# Altium PCB PCB.PcbDoc (part 1 of 2)
Units mil, origin at the board's own origin, x right, y up, seen from the top; angles counter-clockwise.
Board outline 14787 x 8400 mil, 2 copper layers (Top Layer, Bottom Layer); 237 components, 242 nets, 855 pads, 3 vias.
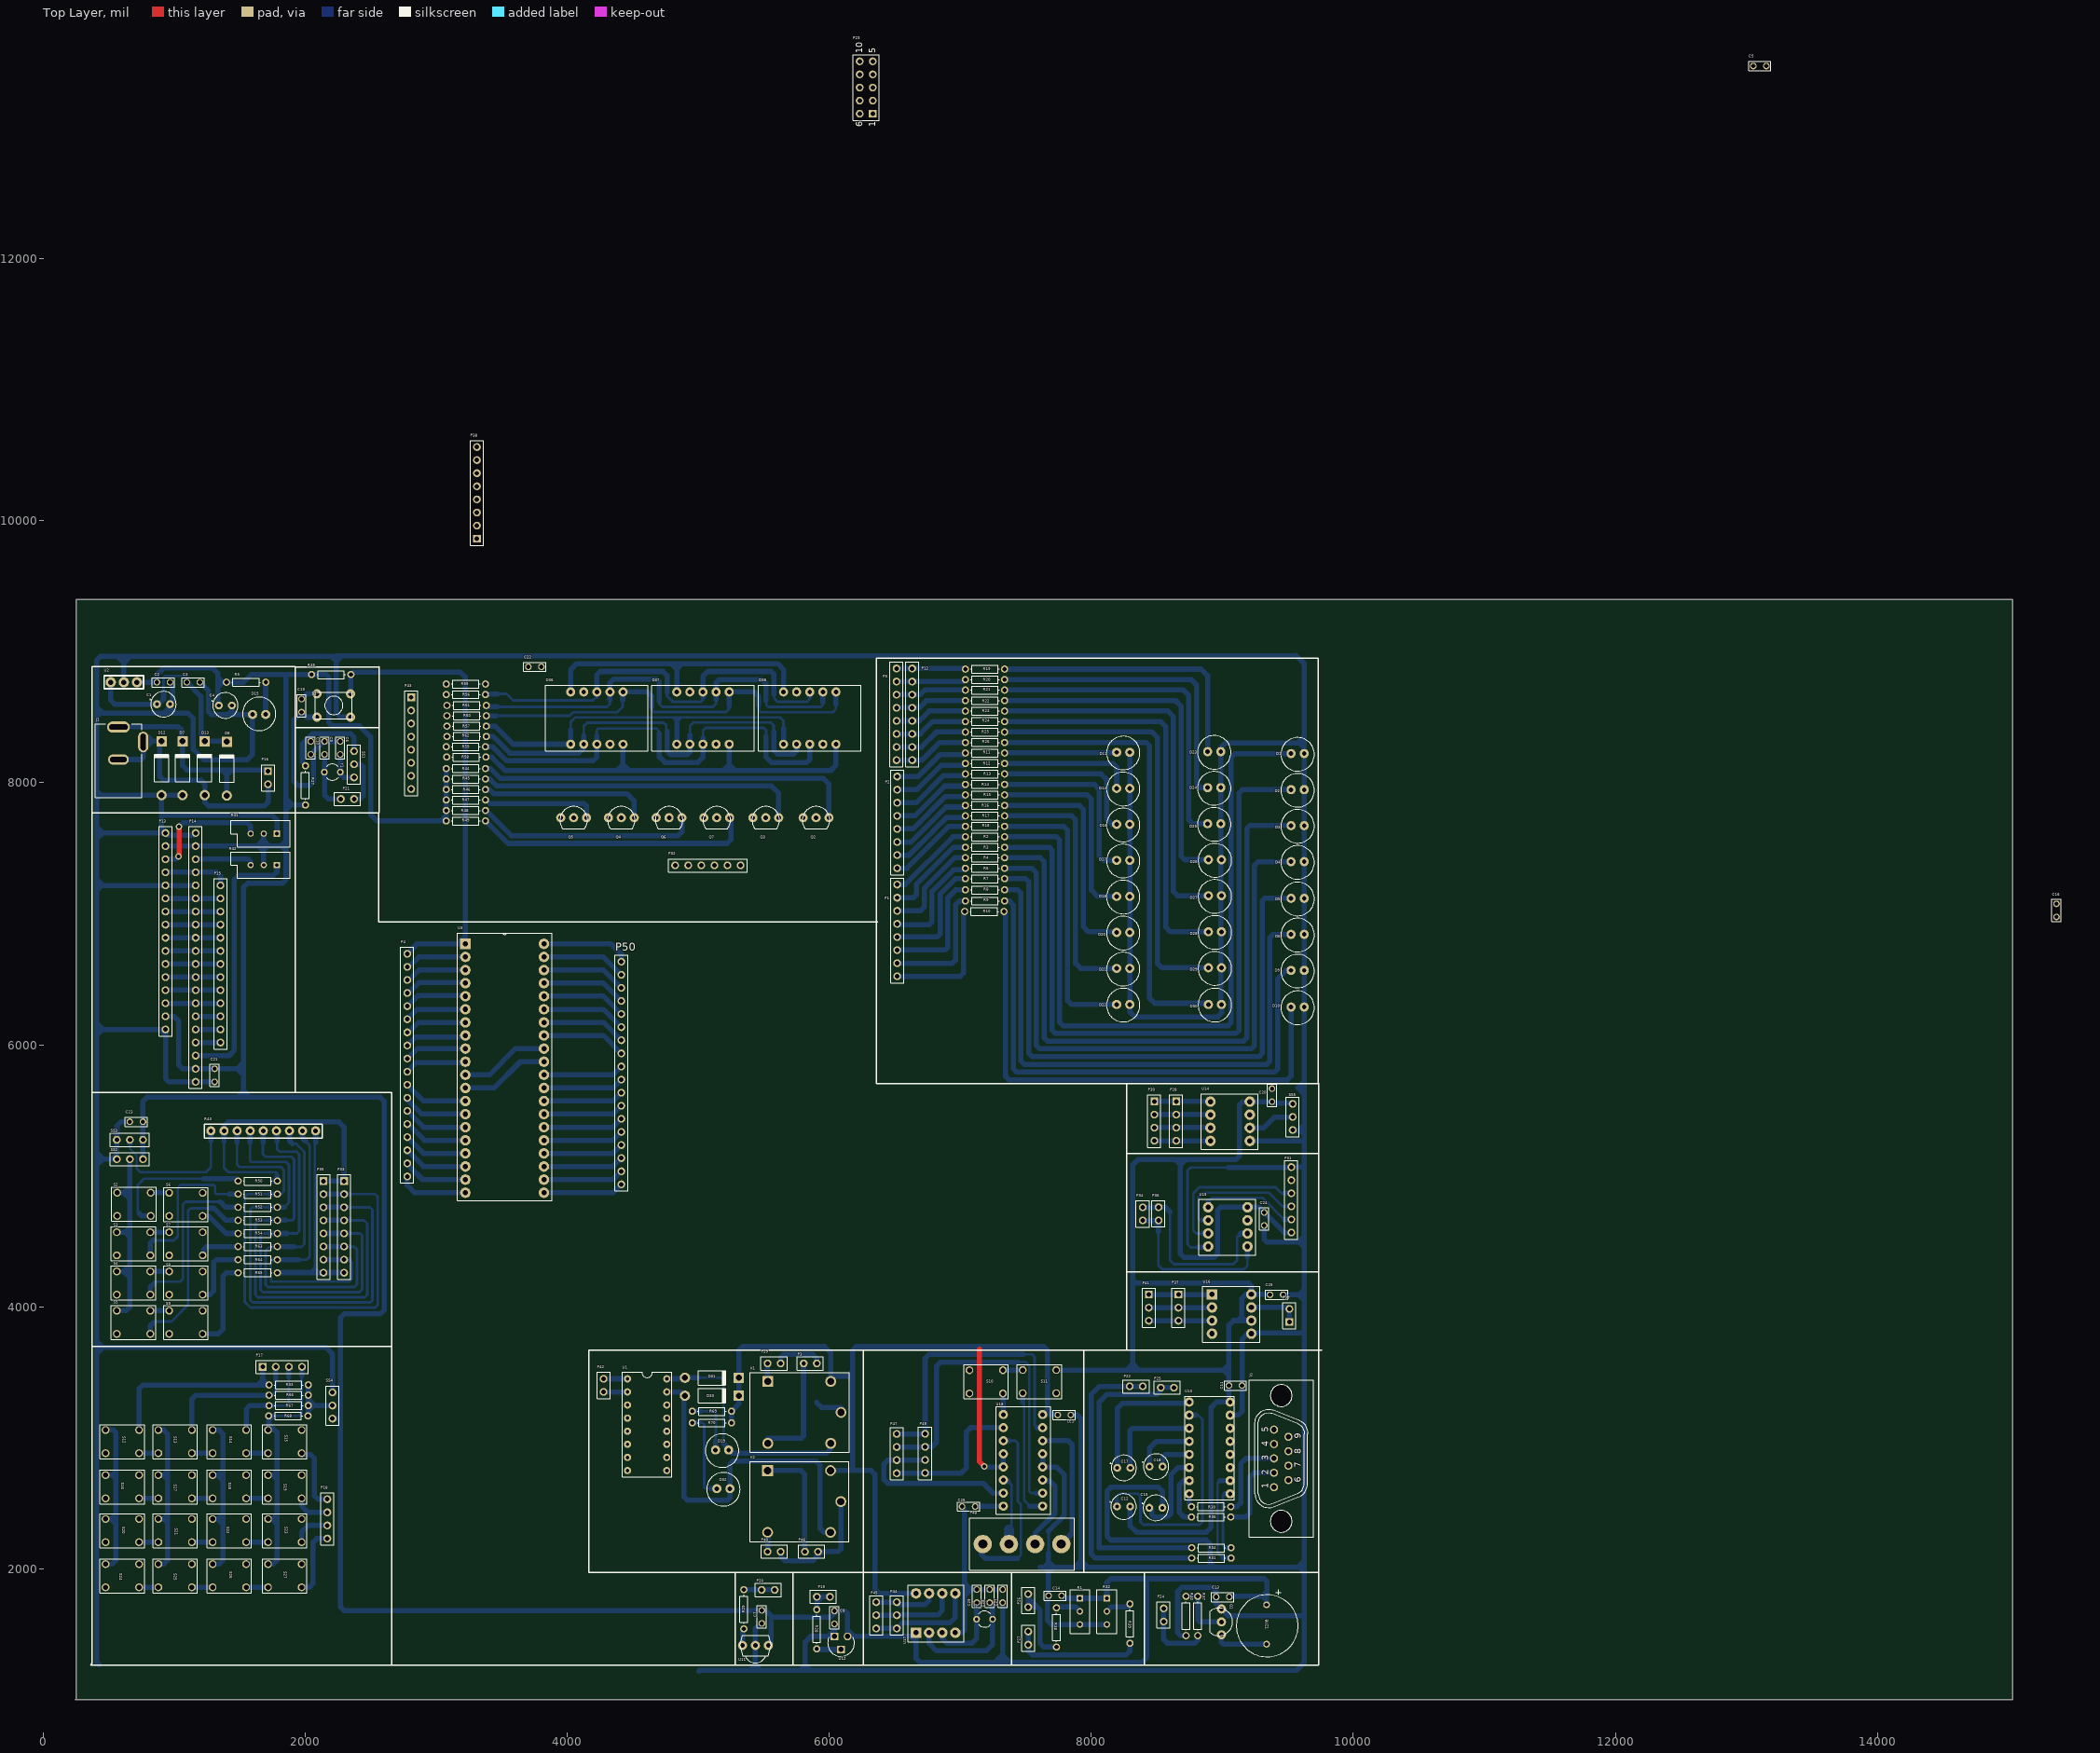
[diagram p0: Top Layer view]
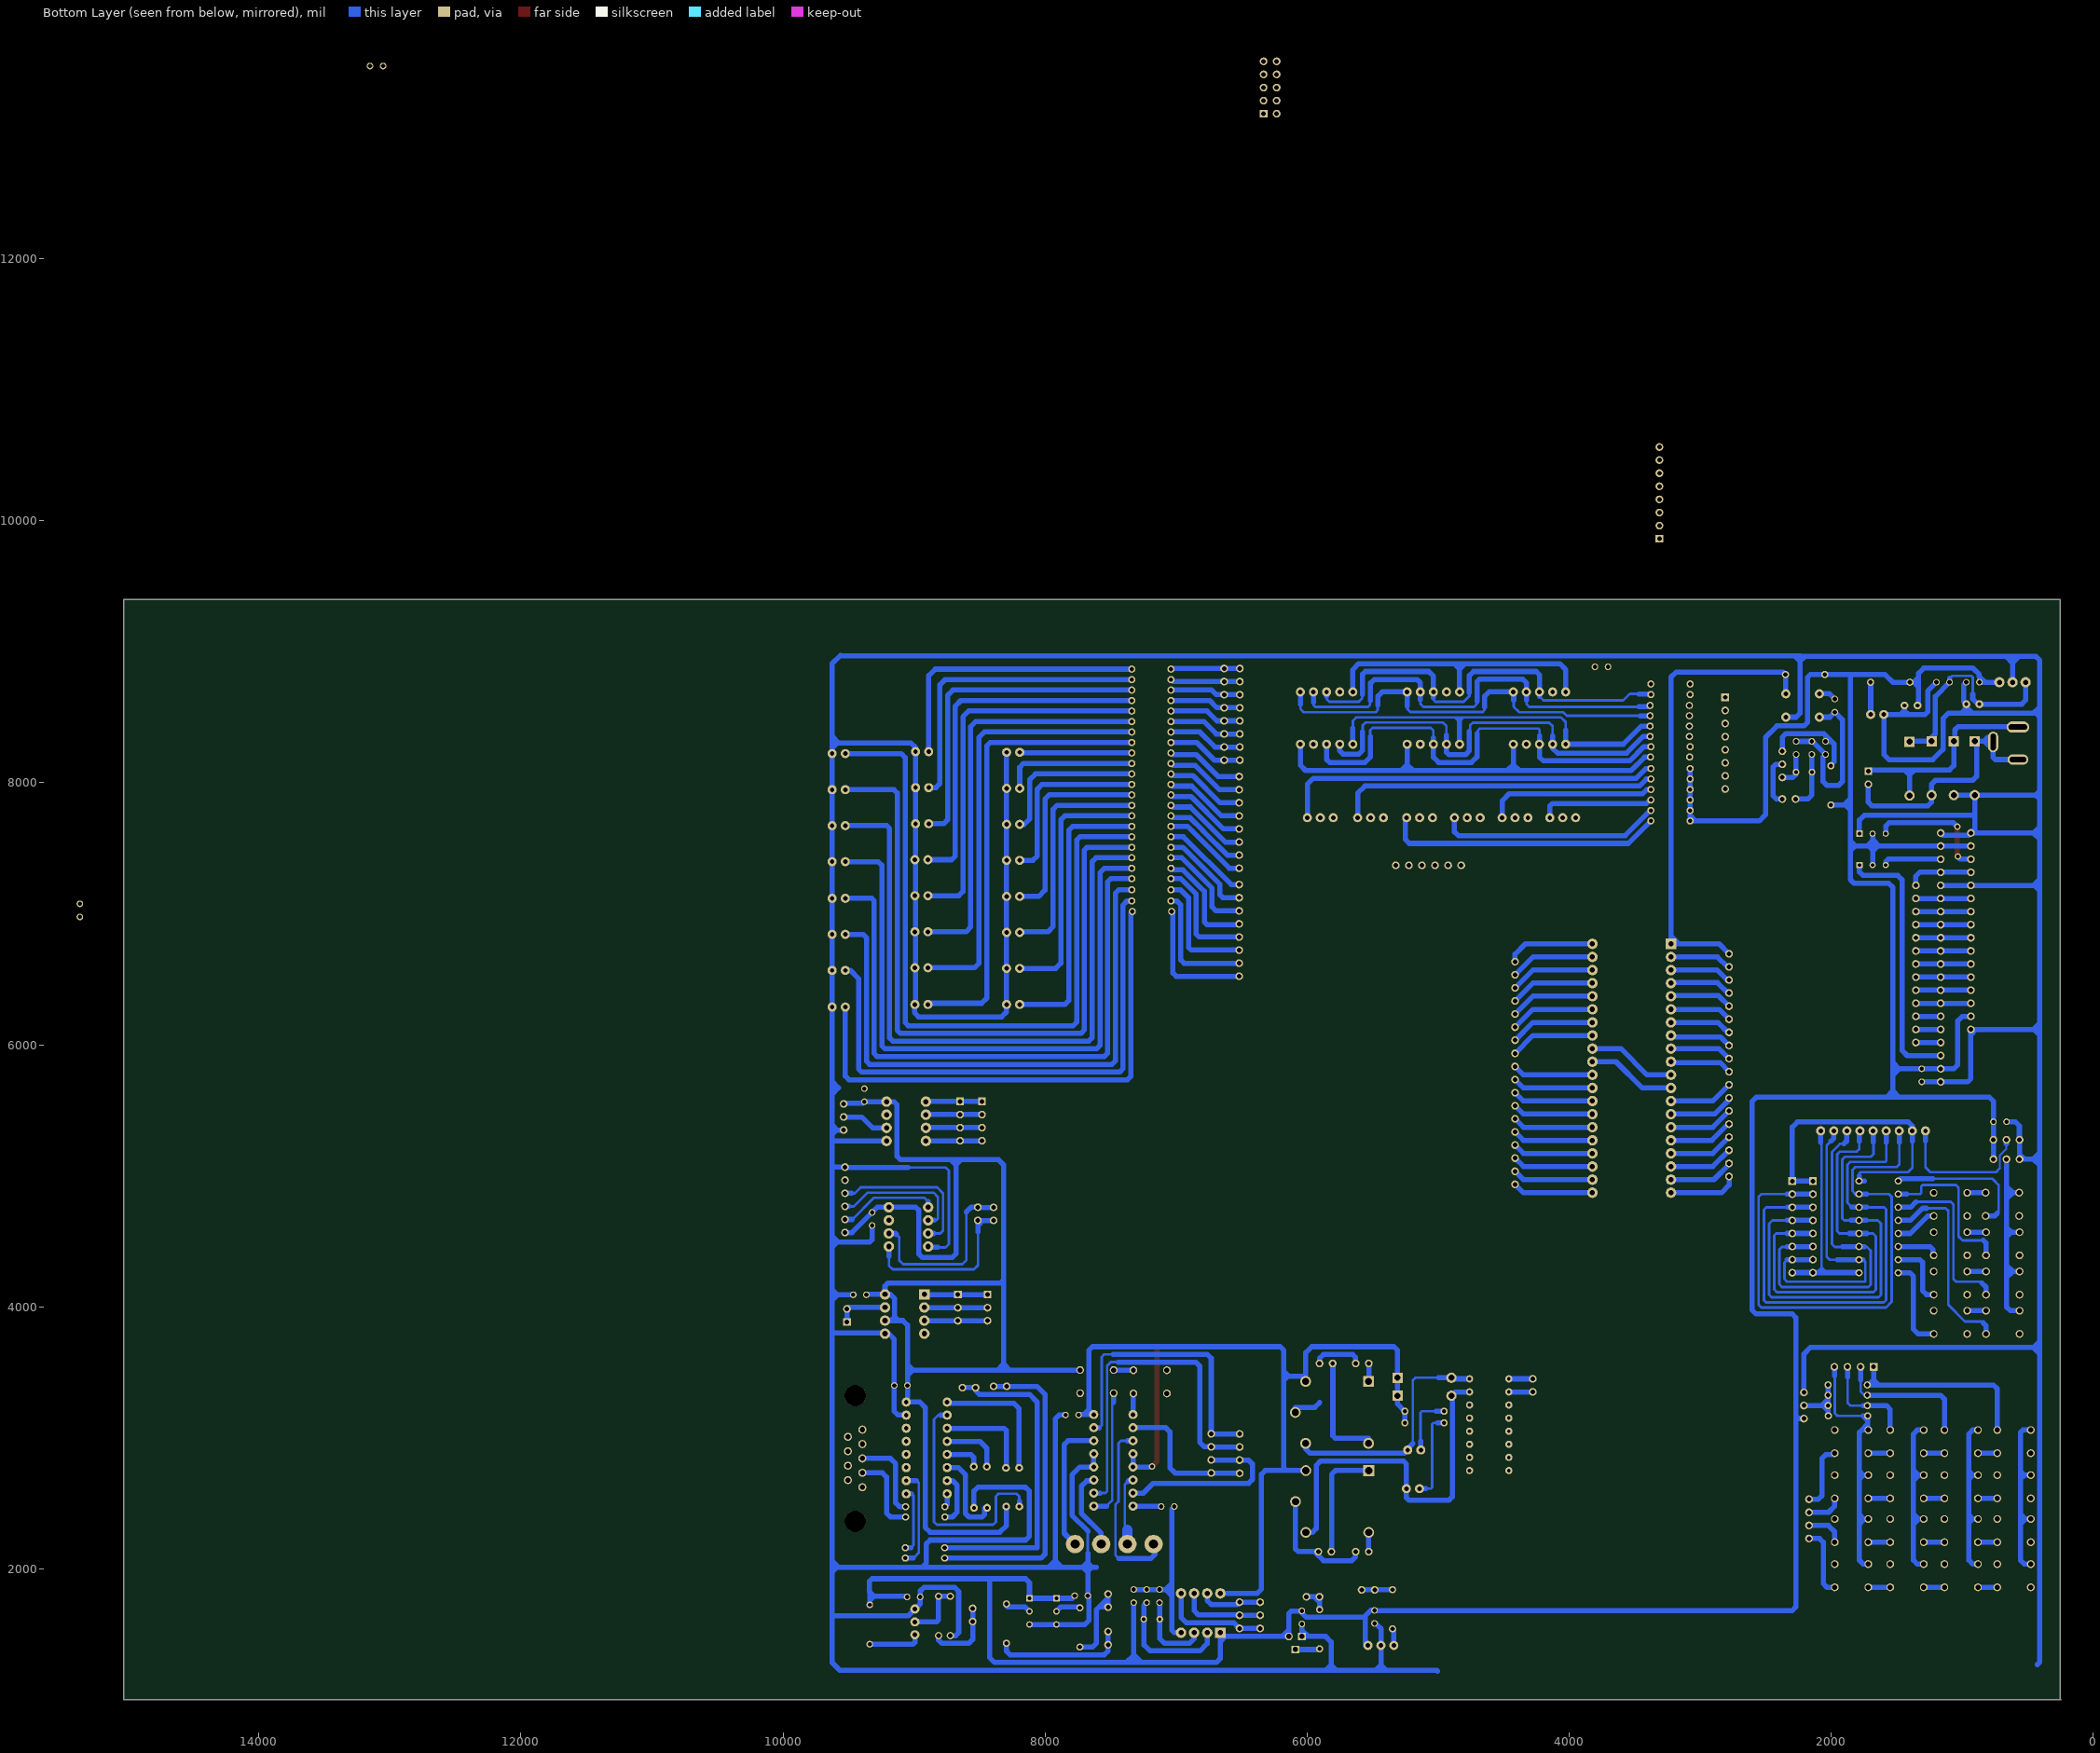
[diagram p1: Bottom Layer view, seen from below]

## Layer stack, top to bottom
Top Solder: solder mask 0.4, Solder Resist, Dk 3.5
Top Layer: signal copper 1.4
Dielectric 1: dielectric 12.6, FR-4, Dk 4.8
Bottom Layer: signal copper 1.4
Bottom Solder: solder mask 0.4, Solder Resist, Dk 3.5

## Board outline
244,1000 251,1007 251,9400 15031,9400 15031,1000

## Design rules (kind name [scope] priority, off if disabled: settings)
Clearance [All] p1: gap=19.68 ignorepadtopadclearanceinfootprint=FALSE
PolygonConnect [All] p1: connectstyle=Relief reliefconductorwidth=10 reliefentries=4 polygonreliefangle="90 Angle" airgapwidth=10
RoutingVias [All] p1: holewidth=28 width=50 viastyle="Through Hole" minholewidth=28 minwidth=50 maxholewidth=28 maxwidth=50
SolderMaskExpansion [All] p1: expansion=4
Width [All] p1: maxlimit=78.74 minlimit=19.68 preferedwidth=39.37
30 further rules are at their usual default settings.

## Components (designator, comment, footprint, x,y, rotation, side; value= is the part's Value field where it differs from the comment)
BUZ1 "CEM-1203(42)" CUI_CEM-1203(42) 9337.5,1724.43 r270 top
C1 "P.CAP" polarityCAP 867.26,8600.39 r0 top value=47U
C2 "cap" cap 967.26,8767.72 r180 top value=104p
C3 "cap" cap 1195.21,8767.72 r180 top value=104p
C4 "P.CAP" polarityCAP 1339.7,8590.55 r0 top value=47U
C5 "cap" cap 13152.3,13472.44 r180 top value=104p
C6 "cap" cap 2266.47,8216.54 r90 top value=22p
C7 "cap" cap 5484.98,1582.68 r90 top value=104p
C8 "cap" cap 6039.23,1678.23 r270 top value=104p
C9 "cap" cap 2146.47,8216.54 r90 top value=22p
C10 "cap" cap 2041.47,8216.54 r90 top value=22p
C11 "cap" cap 9149.98,3399.17 r180 top value=104p
C12 "P.CAP" polarityCAP 8195.88,2475 r0 top value=10U
C13 "cap" cap 8952.5,1784.43 r0 top value=104p
C14 "cap" cap 7673.13,1794.54 r0 top value=104p
C15 "P.CAP" polarityCAP 8441.94,2465.16 r0 top value=10U
C16 "cap" cap 15366.87,6976.38 r90 top value=104p
C17 "P.CAP" polarityCAP 8197.46,2770.28 r0 top value=10U
C18 "P.CAP" polarityCAP 8443.52,2780.12 r0 top value=10U
C19 "cap" cap 1971.2,8539.76 r90 top value=0.1u
C20 "cap" cap 9378.56,5665.55 r270 top value=104p
C21 "cap" cap 1307.66,5717.17 r90 top value=104p
C22 "cap" cap 3701.91,8885.83 r0 top value=104p
C23 "cap" cap 660.57,5412.6 r0 top value=104p
C24 "cap" cap 9319.5,4620.67 r90 top value=104p
C25 "cap" cap 9463.8,4091.65 r180 top value=104p
C26 "cap" cap 7112.89,2475 r180 top value=104p
C27 "cap" cap 7322.5,1841.61 r270 top value=104p
C28 "cap" cap 7224.07,1741.61 r90 top value=22p
C29 "cap" cap 7125.65,1741.61 r90 top value=22p
C31 "cap" cap 7843.13,3173.82 r180 top value=104p
D1 "LED" PCBComponent_1 9524.62,8223.03 r0 top
D2 "LED" PCBComponent_1 9524.62,7948.03 r0 top
D3 "LED" PCBComponent_1 9524.62,7673.03 r0 top
D4 "LED" PCBComponent_1 9524.62,7398.03 r0 top
D5 "LED" PCBComponent_1 9524.62,7118.03 r0 top
D6 "LED" PCBComponent_1 9524.62,6843.03 r0 top
D7 "1N4007" DO-41 1062.35,8111.69 r90 top
D8 "1N4007" DO-41 1400.33,8108.27 r90 top
D9 "LED" PCBComponent_1 9524.62,6568.03 r0 top
D10 "LED" PCBComponent_1 9524.62,6288.03 r0 top
D11 "LED" PCBComponent_1 8192.89,8233.03 r0 top
D12 "1N4007" DO-41 902.66,8111.69 r90 top
D13 "1N4007" DO-41 1231.87,8111.69 r90 top
D14 "LED" PCBComponent_1 8192.89,7958.03 r0 top
D15 "LED" PCBComponent_1 1697.18,8521.65 r180 top
D16 "LED" PCBComponent_1 8192.89,7683.03 r0 top
D17 "LED" PCBComponent_1 8192.89,7408.03 r0 top
D18 "LED" PCBComponent_1 8192.89,7133.03 r0 top
D19 "LED" PCBComponent_1 5131.39,2907.05 r0 top
D20 "LED" PCBComponent_1 8192.89,6858.03 r0 top
D21 "LED" PCBComponent_1 8192.89,6583.03 r0 top
D22 "LED" PCBComponent_1 8192.89,6308.03 r0 top
D23 "LED" PCBComponent_1 8887.89,8238.03 r0 top
D24 "LED" PCBComponent_1 8887.89,7963.03 r0 top
D25 "LED" PCBComponent_1 8887.89,7688.03 r0 top
D26 "LED" PCBComponent_1 8892.89,7413.03 r0 top
D27 "LED" PCBComponent_1 8892.89,7138.03 r0 top
D28 "LED" PCBComponent_1 8892.89,6863.03 r0 top
D29 "LED" PCBComponent_1 8892.89,6588.03 r0 top
D30 "LED" PCBComponent_1 8892.89,6308.03 r0 top
D31 "Diode 1N4007" DO-41 5103.44,3458.23 r0 top
D32 "LED" PCBComponent_1 5141.24,2611.77 r0 top
D33 "Diode 1N4007" DO-41 5103.44,3320.43 r0 top
D36 "7seg" LED_LTD-4708G 3835.28,8494.17 r90 top
D37 "7seg" LED_LTD-4708G 4645.28,8494.17 r90 top
D38 "7seg" LED_LTD-4708G 5460.28,8494.17 r90 top
J1 "Socket" GCT_DCJ235-05-A-XX-X_REVA 573.68,8167.99 r0 top
J2 "DB9M" D-09M 9449.31,2842.2 r90 top
K1 "1-1721150-0" RELAY_ORWH-SH-105D1F,000 5774.23,3193.5 r0 top
K2 "1-1721150-0" RELAY_ORWH-SH-105D1F,000 5772.73,2513.35 r0 top
P1 "Header 8" HDR1X8#1 6517.89,6523.03 r90 top
P2 "Header 8" HDR1X8#1 6517.89,7348.03 r90 top
P3 "Header 2" HDR1X2#1 5804.15,3567.52 r0 top
P4 "Header 18" HDR1X18#1 2778.28,6694.88 r270 top
P5 "Header 8" HDR1X8#1 6512.89,8173.03 r90 top
P12 "Header 8" HDR1X8#1 6632.89,8173.03 r90 top
P13 "Header 16" HDR1X16 932.66,7617.17 r270 top
P14 "Header 20" HDR1X20 1162.66,7617.17 r270 top
P15 "Header 13" HDR1X13 1352.66,7217.17 r270 top
P16 "Header 2" HDR1X2#2 1715.29,8088.58 r270 top
P17 "Header 4" HDR1X4#1 1674.35,3541.34 r0 top
P18 "Header 4" HDR1X4#2 2168.05,2530.71 r270 top
P19 "Header 2" HDR1X2#3 6004.15,1786.02 r180 top
P20 "Header 2" HDR1X2#1 5483.4,1838.58 r0 top
P21 "Header 2" HDR1X2#1 2371.47,7876.54 r180 top
P22 "Header 2" HDR1X2#1 8292.1,3392.72 r0 top
P23 "Header 5X2A" HDR2X5_CEN 6331.43,13108.27 r90 top
P24 "Header 2" HDR1X2#1 8551.79,1597.44 r90 top
P25 "Header 2" HDR1X2#1 8529.9,3382.88 r0 top
P26 "Header 2" HDR1X2#1 7518.32,1707.28 r90 top
P27 "Header 2" HDR1X2#1 7518.32,1420.28 r90 top
P28 "Header 4" HDR1X4#1 8648.01,5567.68 r270 top
P29 "Header 2" HDR1X2#1 5528.56,3567.52 r0 top
P30 "Header 4" HDR1X4#1 8480.68,5567.68 r270 top
P31 "Header 6" HDR1X6 9526.2,4566.73 r90 top
P32 "Header 6" HDR1X6 4822.38,7370.08 r0 top
P33 "Header 8" HDR1X8#2 2296,4959.84 r270 top
P34 "Header 2" HDR1X2#1 8392.1,4759.02 r270 top
P35 "Header 8" HDR1X8#2 2138.52,4959.84 r270 top
P36 "Header 2" HDR1X2#1 8512.42,4760.04 r270 top
P37 "Header 3" HDR1X3#1 8664.98,4093.23 r270 top
P38 "Header 8" HDR1X8#2 3309.78,9863.78 r90 top
P39 "Header 2" HDR1X2#2 9511.43,3883.39 r90 top
P40 "Header 2" HDR1X2#1 5528.64,2130.51 r0 top
P41 "Header 3" HDR1X3#1 8438.6,4093.23 r270 top
P42 "Header 2" HDR1X2#1 4276.67,3449.96 r270 top
P43 "Header 8" HDR1X8#2 2807.81,8652.76 r270 top
P44 "Header 3" HDR1X3#2 6515.41,1544.76 r90 top
P45 "Header 3" HDR1X3#2 6357.93,1544.76 r90 top
P46 "Header 2" HDR1X2#1 5813.99,2130.51 r0 top
P47 "Header 4" HDR1X4#2 6514.39,3029.33 r270 top
P48 "screw terminal" "screw library" 7170.76,2188.54 r0 top
P49 "Header 4" HDR1X4#2 6730.92,3030.91 r270 top
P50 "Header 18" HDR1X18#2 4412.14,4934.65 r90 top
Q1 "2N5172" TRANSISTOR_TO-92 8992.5,1594.43 r270 top
Q2 "2N5172" TRANSISTOR_TO-92 5898.36,7734.25 r0 top
Q3 "2N5172" TRANSISTOR_TO-92 5514.5,7734.25 r0 top
Q4 "2N5172" TRANSISTOR_TO-92 4412.14,7734.25 r0 top
Q5 "2N5172" TRANSISTOR_TO-92 4047.97,7734.25 r0 top
Q6 "2N5172" TRANSISTOR_TO-92 4776.31,7734.25 r0 top
Q7 "2N5172" TRANSISTOR_TO-92 5140.49,7734.25 r0 top
R1 "3296W-1-103ALF" TRIM_3296W-1-103ALF 7913.13,1674.54 r0 top
R2 "Res1" AXIAL-0.3 7187.89,7588.03 r0 top value=470
R3 "Res1" AXIAL-0.3 7187.89,7508.03 r0 top value=470
R4 "Res1" AXIAL-0.3 7187.89,7428.03 r0 top value=470
R5 "Res1" AXIAL-0.3 1547.97,8767.72 r180 top value=2.2K
R6 "Res1" AXIAL-0.3 7187.89,7348.03 r0 top value=470
R7 "Res1" AXIAL-0.3 7187.89,7268.03 r0 top value=470
R8 "Res1" AXIAL-0.3 7187.89,7183.03 r0 top value=470
R9 "Res1" AXIAL-0.3 7187.89,7098.03 r0 top value=470
R10 "Res1" AXIAL-0.3 7182.89,7018.03 r0 top value=470
R11 "Res1" AXIAL-0.3 7187.89,8228.03 r0 top value=470
R12 "Res1" AXIAL-0.3 7187.89,8148.03 r0 top value=470
R13 "Res1" AXIAL-0.3 7187.89,8068.03 r0 top value=470
R14 "Res1" AXIAL-0.3 7187.89,7988.03 r0 top value=470
R15 "Res1" AXIAL-0.3 7187.89,7908.03 r0 top value=470
R16 "Res1" AXIAL-0.3 7187.89,7828.03 r0 top value=470
R17 "Res1" AXIAL-0.3 7187.89,7748.03 r0 top value=470
R18 "Res1" AXIAL-0.3 7187.89,7668.03 r0 top value=470
R19 "Res1" AXIAL-0.3 7187.89,8868.03 r0 top value=470
R20 "Res1" AXIAL-0.3 7187.89,8788.03 r0 top value=470
R21 "Res1" AXIAL-0.3 7187.89,8708.03 r0 top value=470
R22 "Res1" AXIAL-0.3 7187.89,8628.03 r0 top value=470
R23 "Res1" AXIAL-0.3 7187.89,8548.03 r0 top value=470
R24 "Res1" AXIAL-0.3 7187.89,8468.03 r0 top value=470
R25 "Res1" AXIAL-0.3 7187.89,8388.03 r0 top value=470
R26 "Res1" AXIAL-0.3 7187.89,8308.03 r0 top value=470
R27 "Res1" AXIAL-0.3 2000.72,7980.31 r270 top value=4.7K
R28 "Res1" AXIAL-0.3 5903.64,1538.36 r270 top value=470
R29 "Res1" AXIAL-0.3 5347.18,1690.94 r90 top value=470
R30 "Res1" AXIAL-0.3 8913.76,2473.98 r180 top value=470
R31 "Res1" AXIAL-0.3 8915.96,2081.3 r0 top value=470
R32 "3296W-1-103ALF" TRIM_3296W-1-103ALF 8118.13,1674.54 r0 top
R33 "Res1" AXIAL-0.3 1872.77,3403.54 r0 top value=1K
R34 "Res1" AXIAL-0.3 8915.96,2160.04 r180 top value=1K
R35 "Res1" AXIAL-0.3 2197.57,8826.77 r180 top value=10K
R36 "Res1" AXIAL-0.3 8913.76,2395.24 r0 top value=1K
R37 "Res1" AXIAL-0.3 8812.5,1639.43 r270 top value=10K
R38 "Res1" AXIAL-0.3 7733.32,1552.01 r90 top value=4.7K
R39 "Res1" AXIAL-0.3 8294.35,1581.54 r90 top value=4.7K
R40 "Res1" AXIAL-0.3 8722.5,1639.43 r90 top value=10K
R41 "RPot" VR5 1682.66,7612.17 r180 top value=1K
R42 "RPot" VR5 1682.66,7372.17 r180 top value=10K
R43 "10k sip" "10k sip" 1279.07,5343.7 r0 top value=10k*8
R44 "Res1" AXIAL-0.3 3225.28,8109.17 r180 top value=10k
R45 "Res1" AXIAL-0.3 3225.28,8029.17 r180 top value=10k
R46 "Res1" AXIAL-0.3 3225.28,7949.17 r180 top value=10k
R47 "Res1" AXIAL-0.3 3225.28,7869.17 r180 top value=10k
R48 "Res1" AXIAL-0.3 3225.28,7789.17 r180 top value=10k
R49 "Res1" AXIAL-0.3 3225.28,7709.17 r180 top value=10k
R50 "Res1" AXIAL-0.3 1636.55,4959.84 r0 top value=1K
R51 "Res1" AXIAL-0.3 1636.55,4859.84 r0 top value=1K
R52 "Res1" AXIAL-0.3 1636.55,4759.84 r0 top value=1K
R53 "Res1" AXIAL-0.3 1636.55,4659.84 r0 top value=1K
R54 "Res1" AXIAL-0.3 1636.55,4559.84 r0 top value=1K
R55 "Res1" AXIAL-0.3 3225.28,8754.17 r0 top value=470
R56 "Res1" AXIAL-0.3 3225.28,8674.17 r0 top value=470
R57 "Res1" AXIAL-0.3 3231.04,8433.07 r0 top value=470
R58 "Res1" AXIAL-0.3 3228.68,8196.85 r0 top value=470
R59 "Res1" AXIAL-0.3 3225.29,8275.87 r0 top value=470
R60 "Res1" AXIAL-0.3 3231.04,8511.81 r0 top value=470
R61 "Res1" AXIAL-0.3 3231.04,8590.55 r0 top value=470
R62 "Res1" AXIAL-0.3 3231.04,8354.33 r0 top value=470
R63 "Res1" AXIAL-0.3 1636.55,4459.84 r0 top value=1K
R64 "Res1" AXIAL-0.3 1636.55,4359.84 r0 top value=1K
R65 "Res1" AXIAL-0.3 1636.55,4259.84 r0 top value=1K
R66 "Res1" AXIAL-0.3 1872.77,3324.8 r0 top value=1K
R67 "Res1" AXIAL-0.3 1872.77,3246.06 r0 top value=1K
R68 "Res1" AXIAL-0.3 1870.41,3167.32 r0 top value=1K
R69 "Res1" AXIAL-0.3 5103.44,3202.32 r180 top value=470K
R70 "Res1" AXIAL-0.3 5103.44,3113.74 r180 top value=470K
S1 "SKHHANA010" SW_SKHHANA010 2217.26,8590.55 r180 top
S2 "SKHHANA010" buttons 566.67,4872.68 r0 top
S3 "SKHHANA010" buttons 563.72,4571.26 r0 top
S4 "SKHHANA010" buttons 563.72,4271.26 r0 top
S5 "SKHHANA010" buttons 563.72,3971.26 r0 top
S6 "SKHHANA010" buttons 963.72,4871.26 r0 top
S7 "SKHHANA010" buttons 963.72,4571.26 r0 top
S8 "SKHHANA010" buttons 963.72,4271.26 r0 top
S9 "SKHHANA010" buttons 963.72,3971.26 r0 top
S10 "SKHHANA010" buttons 7071.94,3517.28 r0 top
S11 "SKHHANA010" buttons 7478.44,3518.7 r0 top
S12 "SKHHANA010" buttons 478.09,3060.47 r0 top
S13 "SKHHANA010" buttons 881.63,3060.47 r0 top
S14 "SKHHANA010" buttons 1295.02,3060.47 r0 top
S15 "SKHHANA010" buttons 1718.24,3060.47 r0 top
S16 "SKHHANA010" buttons 478.09,2715.98 r0 top
S17 "SKHHANA010" buttons 881.63,2715.98 r0 top
S18 "SKHHANA010" buttons 1295.02,2715.98 r0 top
S19 "SKHHANA010" buttons 1718.24,2715.98 r0 top
S20 "SKHHANA010" buttons 478.09,2381.34 r0 top
S21 "SKHHANA010" buttons 881.63,2381.34 r0 top
S22 "SKHHANA010" buttons 1295.02,2381.34 r0 top
S23 "SKHHANA010" buttons 1718.24,2381.34 r0 top
S24 "SKHHANA010" buttons 478.09,2036.85 r0 top
S25 "SKHHANA010" buttons 881.63,2036.85 r0 top
S26 "SKHHANA010" buttons 1295.02,2036.85 r0 top
S27 "SKHHANA010" buttons 1718.24,2036.85 r0 top
SS1 "Header 3" HDR1X3#2 2371.47,8041.54 r90 top
SS2 "Header 3" HDR1X3#2 760.57,5127.17 r180 top
SS3 "Header 3" HDR1X3#2 760.57,5274.8 r180 top
SS4 "Header 3" HDR1X3#2 2207.42,3146.06 r90 top
SS5 "Header 3" HDR1X3#2 9536.04,5549.02 r270 top
U1 "ULN2004A" ULN2004A 4608.95,3099.96 r270 top
U2 "LM7805" LM7805 514.5,8767.72 r0 top
U3 "PIC16F887" PIC(40pin) 3221.59,6770.87 r0 top
U11 "1838V" TSOP18XX 5435.76,1415.35 r0 top
U12 "LM35" TO127P254X495-3P 6039.23,1383.23 r180 top
U13 "MAX232" DIP794W45P254L1969H508Q16 8902.73,2922.65 r0 top
U14 "93LC46A/P" PIC10F220#1 8909.03,5566.1 r0 top
U15 "24AA1025" PIC10F220#1 8891.55,4760.04 r0 top
U16 "TLC5615" PIC10F220#2 8920.88,4094.8 r0 top
U17 "DS1302" PIC10F220#2 6661.47,1512.09 r90 top
U18 "L293D" L293D 7327.85,3177.52 r0 top
Y1 "XTAL" R38 2206.47,8081.54 r270 top value=20MHz
Y2 "XTAL" R38 7184.7,1615.24 r270 top value=32.768MHz

## Footprints (in the part's own frame and the unit in brackets; to place one, negate y for a bottom-side part, rotate by r counter-clockwise, add the part's x,y. Pads: shape width x height; smd on the part's side, far side on the other; paste and mask are expansions set on the pad)
"10k sip" [mil]
  round 70 hole 35: 1(0,0) 2(100,0) 3(200,0) 4(300,0) 5(400,0) 6(500,0) 7(600,0) 8(700,0) 9(800,0)
  silkscreen extent -50,-55 850,50
AXIAL-0.3 [mm] "Axial Device, Thru-Hole; 2 Leads; 0.3 in Pin Spacing"
  round 1.4 hole 0.85: 1(-3.81,0) 2(3.81,0)
  silkscreen extent -2.77,-0.76 2.77,0.76
buttons [mm]
  round 1.498 hole 0.99: 1(-0.075,-0.036) 2(6.425,-0.036) 3(-0.075,-4.536) 4(6.425,-4.536)
  silkscreen extent -1.14,-5.59 7.49,1.02
cap [mm]
  round 1.28 hole 0.85: 1(0,0) 2(2.54,0)
  silkscreen extent -0.89,-0.89 3.43,0.89
CUI_CEM-1203(42) [mm]
  round 1.308 hole 0.8: N(7.62,0) P(0,0)
  silkscreen extent -2.92,-5.87 10.06,6.13
D-09M [mil]
  round 62 hole 40: 1(-220,55) 2(-110,55) 3(0,55) 4(110,55) 5(220,55) 6(-165,-55) 7(-55,-55) 8(55,-55) 9(165,-55)
  round 162 hole 162 unplated: ""(-480,0) ""(480,0)
  silkscreen extent -600,-245 600,245
DIP794W45P254L1969H508Q16 [mil]
  round 70 hole 35: 1(-156.3,350) 2(-156.3,250) 3(-156.3,150) 4(-156.3,50) 5(-156.3,-50) 6(-156.3,-150) 7(-156.3,-250) 8(-156.3,-350) 9(156.3,-350) 10(156.3,-250) 11(156.3,-150) 12(156.3,-50) 13(156.3,50) 14(156.3,150) 15(156.3,250) 16(156.3,350)
  silkscreen extent -190,-395 190,395
DO-41 [mm] "Diode, Axial; Body 5.2 x 2.7 mm (LxDia. max), Lead Dia. 0.86 mm (max)"
  round 2 hole 1.2: 1(-5.23,0)
  rect 2x2 hole 1.2: 2(5.23,0)
  silkscreen extent -2.65,-1.4 2.75,1.4
GCT_DCJ235-05-A-XX-X_REVA [mm]
  oval 4.4x2.2 hole 1 slot 3.6 at 0 deg: 1(0,6.55)
  oval 4x2 hole 1 slot 3.2 at 0 deg: 2(0,0.25)
  oval 2x4 hole 1 slot 3.2 at 90 deg: 3(4.8,3.65)
  silkscreen extent -4.5,-7.15 4.5,7.15
HDR1X2#1 [mm] "Connector; Header; 2 Position"
  round 1.5 hole 0.9: 1(0,0) 2(2.54,0)
  silkscreen extent -1.27,-1.27 3.81,1.27
HDR1X2#2 [mm] "Connector; Header; 2 Position"
  rect 1.5x1.5 hole 0.9: 1(0,0)
  round 1.5 hole 0.9: 2(2.54,0)
  silkscreen extent -1.27,-1.27 3.81,1.27
HDR1X2#3 [mm] "Connector; Header; 2 Position"
  round 1.5 hole 0.9: 1(0,0) 1(2.54,0)
  silkscreen extent -1.27,-1.27 3.81,1.27
HDR1X3#1 [mm] "Connector; Header; 3 Position"
  rect 1.5x1.5 hole 0.9: 1(0,0)
  round 1.5 hole 0.9: 2(2.54,0) 3(5.08,0)
  silkscreen extent -1.27,-1.27 6.35,1.27
HDR1X3#2 [mm] "Connector; Header; 3 Position"
  round 1.5 hole 0.9: 1(0,0) 2(2.54,0) 3(5.08,0)
  silkscreen extent -1.27,-1.27 6.35,1.27
HDR1X4#1 [mm] "Connector; Header; 4 Position"
  rect 1.5x1.5 hole 0.9: 1(0,0)
  round 1.5 hole 0.9: 2(2.54,0) 3(5.08,0) 4(7.62,0)
  silkscreen extent -1.27,-1.27 8.89,1.27
HDR1X4#2 [mm] "Connector; Header; 4 Position"
  round 1.5 hole 0.9: 1(0,0) 2(2.54,0) 3(5.08,0) 4(7.62,0)
  silkscreen extent -1.27,-1.27 8.89,1.27
HDR1X6 [mm] "Connector; Header; 6 Position"
  round 1.5 hole 0.9: 1(0,0) 2(2.54,0) 3(5.08,0) 4(7.62,0) 5(10.16,0) 6(12.7,0)
  silkscreen extent -1.27,-1.27 13.97,1.27
HDR1X8#1 [mm] "Connector; Header; 8 Position"
  round 1.5 hole 0.9: 1(0,0) 2(2.54,0) 3(5.08,0) 4(7.62,0) 5(10.16,0) 6(12.7,0) 7(15.24,0) 8(17.78,0)
  silkscreen extent -1.27,-1.27 19.05,1.27
HDR1X8#2 [mm] "Connector; Header; 8 Position"
  rect 1.5x1.5 hole 0.9: 1(0,0)
  round 1.5 hole 0.9: 2(2.54,0) 3(5.08,0) 4(7.62,0) 5(10.16,0) 6(12.7,0) 7(15.24,0) 8(17.78,0)
  silkscreen extent -1.27,-1.27 19.05,1.27
HDR1X13 [mm] "Connector; Header; 13 Position"
  round 1.5 hole 0.9: 1(0,0) 2(2.54,0) 3(5.08,0) 4(7.62,0) 5(10.16,0) 6(12.7,0) 7(15.24,0) 8(17.78,0) 9(20.32,0) 10(22.86,0) 11(25.4,0) 12(27.94,0) 13(30.48,0)
  silkscreen extent -1.27,-1.27 31.75,1.27
HDR1X16 [mm] "Connector; Header; 16 Position"
  round 1.5 hole 0.9: 1(0,0) 2(2.54,0) 3(5.08,0) 4(7.62,0) 5(10.16,0) 6(12.7,0) 7(15.24,0) 8(17.78,0) 9(20.32,0) 10(22.86,0) 11(25.4,0) 12(27.94,0) 13(30.48,0) 14(33.02,0) 15(35.56,0) 16(38.1,0)
  silkscreen extent -1.27,-1.27 39.37,1.27
HDR1X18#1 [mm] "Connector; Header; 18 Position"
  round 1.5 hole 0.9: 1(0,0) 2(2.54,0) 3(5.08,0) 4(7.62,0) 5(10.16,0) 6(12.7,0) 7(15.24,0) 8(17.78,0) 9(20.32,0) 10(22.86,0) 11(25.4,0) 12(27.94,0) 13(30.48,0) 14(33.02,0) 15(35.56,0) 16(38.1,0) 17(40.64,0) 18(43.18,0)
  silkscreen extent -1.27,-1.27 44.45,1.27
HDR1X18#2 [mm] "Connector; Header; 18 Position"
  round 1.5 hole 0.9: 1(43.18,0) 2(40.64,0) 3(38.1,0) 4(35.56,0) 5(33.02,0) 6(30.48,0) 7(27.94,0) 8(25.4,0) 9(22.86,0) 10(20.32,0) 11(17.78,0) 12(15.24,0) 13(12.7,0) 14(10.16,0) 15(7.62,0) 16(5.08,0) 17(2.54,0) 18(0,0)
  silkscreen extent -1.27,-1.27 44.45,1.27
HDR1X20 [mm] "Connector; Header; 20 Position"
  round 1.5 hole 0.9: 1(0,0) 2(2.54,0) 3(5.08,0) 4(7.62,0) 5(10.16,0) 6(12.7,0) 7(15.24,0) 8(17.78,0) 9(20.32,0) 10(22.86,0) 11(25.4,0) 12(27.94,0) 13(30.48,0) 14(33.02,0) 15(35.56,0) 16(38.1,0) 17(40.64,0) 18(43.18,0) 19(45.72,0) 20(48.26,0)
  silkscreen extent -1.27,-1.27 49.53,1.27
HDR2X5_CEN [mm] "Connector; Header; 5x2 Position"
  rect 1.5x1.5 hole 0.9: 1(0,0)
  round 1.5 hole 0.9: 2(2.54,0) 3(5.08,0) 4(7.62,0) 5(10.16,0) 6(0,2.54) 7(2.54,2.54) 8(5.08,2.54) 9(7.62,2.54) 10(10.16,2.54)
  silkscreen extent -1.27,-1.27 11.43,3.81
L293D [mil]
  round 70 hole 35: 1(0,0) 2(0,-100) 3(0,-200) 4(0,-300) 5(0,-400) 6(0,-500) 7(0,-600) 8(0,-700) 9(300,-700) 10(300,-600) 11(300,-500) 12(300,-400) 13(300,-300) 14(300,-200) 15(300,-100) 16(300,0)
  silkscreen extent -55,-760 360,60
LED_LTD-4708G [mil]
  round 70 hole 35: 1(-200,-190) 2(-200,-290) 3(-200,-390) 4(-200,-490) 5(-200,-590) 6(200,-590) 7(200,-490) 8(200,-390) 9(200,-290) 10(200,-190)
  silkscreen extent -252,-781 252,1
LM7805 [mm]
  round 2 hole 1: 1(0,0) 2(2.54,0) 3(5.08,0)
  silkscreen extent -1.27,-1.27 6.35,1.27
PCBComponent_1 [mil]
  round 70 hole 35: 1(0,0) 2(100,0)
  silkscreen extent -78,-133 178,123
PIC10F220#1 [mil]
  round 80 hole 40: 1(0,0) 2(0,-100) 3(0,-200) 4(0,-300) 5(300,-300) 6(300,-200) 7(300,-100) 8(300,0)
  silkscreen extent -70,-365 365,60
PIC10F220#2 [mil]
  rect 80x80 hole 40: 1(0,0)
  round 80 hole 40: 2(0,-100) 3(0,-200) 4(0,-300) 5(300,-300) 6(300,-200) 7(300,-100) 8(300,0)
  silkscreen extent -70,-365 365,60
PIC(40pin) [mil]
  rect 80x80 hole 40: 1(0,0)
  round 80 hole 40: 2(0,-100) 3(0,-200) 4(0,-300) 5(0,-400) 6(0,-500) 7(0,-600) 8(0,-700) 9(0,-800) 10(0,-900) 11(0,-1000) 12(0,-1100) 13(0,-1200) 14(0,-1300) 15(0,-1400) 16(0,-1500) 17(0,-1600) 18(0,-1700) 19(0,-1800) 20(0,-1900) 21(600,-1900) 22(600,-1800) 23(600,-1700) 24(600,-1600) 25(600,-1500) 26(600,-1400) 27(600,-1300) 28(600,-1200) 29(600,-1100) 30(600,-1000) 31(600,-900) 32(600,-800) 33(600,-700) 34(600,-600) 35(600,-500) 36(600,-400) 37(600,-300) 38(600,-200) 39(600,-100) 40(600,0)
  silkscreen extent -60,-1960 660,82
polarityCAP [mil]
  round 60 hole 30: 1(0,0) 2(100,0)
  silkscreen extent -55,-97 147,97
R38 [mm] "Crystal, Thru-Hole; 2 Leads; Body 3.1 x 8.2 mm (Dia.xH)"
  round 1.3 hole 0.7: 1(0,1.55) 2(0,-1.55)
  silkscreen extent -1.55,-1.19 1.55,1.17
RELAY_ORWH-SH-105D1F,000 [mm]
  rect 2.1x2.1 hole 1.4: 1(-6.2,6)
  round 2.1 hole 1.4: 2(-6.2,-6) 3(6,6) 4(8,0) 5(6,-6)
  silkscreen extent -9.6,-7.75 9.6,7.75
"screw library" [mil]
  round 140 hole 70: 1(0,0) 2(200,0) 3(400,0) 4(600,0)
  silkscreen extent -100,-200 700,200
SW_SKHHANA010 [mil]
  round 70 hole 35: 1(-128,89) 2(128,89) 3(-128,-89) 4(128,-89)
  silkscreen extent -140,-100 140,100
TO127P254X495-3P [mil]
  round 59 hole 39: 1(-100,-100)
  rect 59x59 hole 39: 2(-50,0) 3(0,-100)
  silkscreen extent -153,-95 52,52
TRANSISTOR_TO-92 [mil]
  round 70 hole 35: 1(98.43,0) 2(0,0) 3(-98.43,0)
  silkscreen extent -105,-85 105,85
TRIM_3296W-1-103ALF [mm]
  rect 1.248x1.248 hole 0.74: 1(0,2.54)
  round 1.248 hole 0.74: 2(0,0) 3(0,-2.54)
  silkscreen extent -1.91,-4.32 1.91,4.19
TSOP18XX [mil]
  round 70 hole 35: GND(-0.05,-1.05) OUT(-98.47,-1.05) VCC(98.38,-1.05)
  silkscreen extent -118,-134 118,78
ULN2004A [mm]
  round 1.4 hole 0.7: 1(-8.89,-3.81) 2(-6.35,-3.81) 3(-3.81,-3.81) 4(-1.27,-3.81) 5(1.27,-3.81) 6(3.81,-3.81) 7(6.35,-3.81) 8(8.89,-3.81) 9(8.89,3.81) 10(6.35,3.81) 11(3.81,3.81) 12(1.27,3.81) 13(-1.27,3.81) 14(-3.81,3.81) 15(-6.35,3.81) 16(-8.89,3.81)
  silkscreen extent -10.16,-4.83 10.16,4.83
VR5 [mm] "Thru-Hole; 3 Leads"
  rect 1.2x1.2 hole 0.7: 1(-2.54,0)
  round 1.2 hole 0.7: 2(0,0) 3(2.54,0)
  silkscreen extent -5.08,-2.54 6.35,2.54

## Part data
BUZ1: "12 mm, 3.5 V, 85 dB, Through Hole, Magnetic Audio Transducer Buzzer", Package="TO-220 CUI Inc.", Availability=Unavailable, CUI_purchase_URL=https://www.cuidevices.com/product/audio/buzzers/audio-transducers/cem-1203_42_?utm_source=snapeda.com&utm_medium=referral&utm_campaign=snapedaBOM, MF="CUI Devices", MP=CEM-1203_42_, Price=None, SnapEDA_Link=https://www.snapeda.com/parts/CEM-1203%2842%29/CUI%20Devices/view-part/1320038/?ref=snap
C1 C4 C12 C15 C17 C18: library part CAP
D7 D8 D12 D13: library part "Diode 1N4007", "1 Amp General Purpose Rectifier", Code_JEDEC=DO-204-AL, ComponentLink1Description="Manufacturer Link", ComponentLink1URL=http://www.fairchildsemi.com/, ComponentLink2Description=Datasheet, ComponentLink2URL=http://www.fairchildsemi.com/ds/1N%2F1N4001.pdf, DatasheetVersion=1998, LatestRevisionDate=17-Jul-2002, LatestRevisionNote="Re-released for DXP Platform.", PackageDescription="Diode, Axial; Body 5.2 x 2.7 mm (LxDia. max), Lead Dia. 0.86 mm (max)", PackageReference=DO-41, PackageVersion=Aug-1999, Published=8-Jun-2000, Publisher="Altium Limited"
D31 D33: "1 Amp General Purpose Rectifier", Code_JEDEC=DO-204-AL, ComponentLink1Description="Manufacturer Link", ComponentLink1URL=http://www.fairchildsemi.com/, ComponentLink2Description=Datasheet, ComponentLink2URL=http://www.fairchildsemi.com/ds/1N%2F1N4001.pdf, DatasheetVersion=1998, LatestRevisionDate=17-Jul-2002, LatestRevisionNote="Re-released for DXP Platform.", PackageDescription="Diode, Axial; Body 5.2 x 2.7 mm (LxDia. max), Lead Dia. 0.86 mm (max)", PackageReference=DO-41, PackageVersion=Aug-1999, Published=8-Jun-2000, Publisher="Altium Limited"
D36 D37 D38: library part LTD-4708G, "LED 2-DIGIT 7-SEGMENT DISPLAY GREEN", Package="DIP-10 Lite-On", Availability=Unavailable, MF=Lite-On, MP=LTD-4708G, Price=None, SnapEDA_Link=https://www.snapeda.com/parts/LTD-4708G/Lite-On/view-part/273971/?ref=snap
J1: library part DCJ235-05-A-XX-X_REVA, "Dc Power Jack, 5a, 20vdc, Black", Package=None, Availability=Unavailable, MF="Global Connector Technology", MP=DCJ235-05-A-K1-A, Price=None, SnapEDA_Link=https://www.snapeda.com/parts/DCJ235-05-A-K1-A/Global%20Connector%20Technology/view-part/813042/?ref=snap
J2: "Adapter Connector D-Sub, 9 Pin Male To D-Sub, 9 Pin Male Free Hanging _In-Line_", Package=None, Availability=Unavailable, MF="NorComp Inc.", MP=DB9M, Price=None, SnapEDA_Link=https://www.snapeda.com/parts/DB9M/NorComp%20Inc./view-part/558713/?ref=snap
K1 K2: library part ORWH-SH-105D1F,000, "Electromechanical Relay 5VDC 15A SPDT __ 19.2mm 15.5mm 15mm__ THT General Purpose Relay", Package=None, Availability=Unavailable, MF="TE Connectivity", MP=ORWH-SH-105D1F,000, Price=None, SnapEDA_Link=https://www.snapeda.com/parts/ORWH-SH-105D1F%2C000/TE%20Connectivity%20Potter%20%26%20Brumfield%20Relays/view-part/573992/?ref=snap, TE_purchase_URL=https://www.te.com/usa-en/product-1-1721150-0.html?te_bu=Cor&te_type=disp&te_campaign=seda_glo_cor-seda-global-disp-prtnr-fy19-seda-model-bom-cta_sma-317_1&elqCampaignId=32493
P1 P2 P5 P12 P33 P35 P38 P43: "Header, 8-Pin", LatestRevisionDate=17-Jul-2002, LatestRevisionNote="Re-released for DXP Platform.", Publisher="Altium Limited"
P3 P16 P19 P20 P21 P22 P24 P25 P26 P27 P29 P34 P36 P39 P40 P42 P46: "Header, 2-Pin", LatestRevisionDate=17-Jul-2002, LatestRevisionNote="Re-released for DXP Platform.", Publisher="Altium Limited"
P4 P50: "Header, 18-Pin", LatestRevisionDate=17-Jul-2002, LatestRevisionNote="Re-released for DXP Platform.", Publisher="Altium Limited"
P13: "Header, 16-Pin", LatestRevisionDate=17-Jul-2002, LatestRevisionNote="Re-released for DXP Platform.", Publisher="Altium Limited"
P14: "Header, 20-Pin", LatestRevisionDate=17-Jul-2002, LatestRevisionNote="Re-released for DXP Platform.", Publisher="Altium Limited"
P15: "Header, 13-Pin", LatestRevisionDate=17-Jul-2002, LatestRevisionNote="Re-released for DXP Platform.", Publisher="Altium Limited"
P17 P18 P28 P30 P47 P49: "Header, 4-Pin", LatestRevisionDate=17-Jul-2002, LatestRevisionNote="Re-released for DXP Platform.", Publisher="Altium Limited"
P23: "Header, 5-Pin, Dual row", LatestRevisionDate=17-Jul-2002, LatestRevisionNote="Re-released for DXP Platform.", Publisher="Altium Limited"
P31 P32: "Header, 6-Pin", LatestRevisionDate=17-Jul-2002, LatestRevisionNote="Re-released for DXP Platform.", Publisher="Altium Limited"
P37 P41 P44 P45 SS1 SS2 SS3 SS4 SS5: "Header, 3-Pin", LatestRevisionDate=17-Jul-2002, LatestRevisionNote="Re-released for DXP Platform.", Publisher="Altium Limited"
Q1 Q2 Q3 Q4 Q5 Q6 Q7: "Bipolar (BJT) Transistor NPN 25V 500mA 625mW Through Hole TO-92-3", Package="TO-92 ON Semiconductor", Availability=Warning, DigiKey-Purchase-URL=https://snapeda.com/shop?store=DigiKey&id=2663226, MF="ON Semiconductor", MP=2N5172, Price=None, SnapEDA_Link=https://www.snapeda.com/parts/2N5172/ON%20Semiconductor/view-part/2663226/?ref=snap
R1 R32: "10 kOhms 0.5W, 1 / 2W PC Pins qua lỗ Trimmer Potentiometer Cermet 25 Turn Top Điều chỉnh", Package="1005 Bourns", Availability=Warning, MF=Bourns, Mouser-Purchase-URL=https://snapeda.com/shop?store=Mouser&id=697371, MP=3296W-1-103ALF, Price=None, SnapEDA_Link=https://www.snapeda.com/parts/3296W-1-103ALF/Bourns/view-part/697371/?ref=snap
R2 R3 R4 R5 R6 R7 R8 R9 R10 R11 R12 R13 R14 R15 R16 R17 R18 R19 R20 R21 R22 R23 R24 R25 R26 R27 R28 R29 R30 R31 R33 R34 R35 R36 R37 R38 R39 R40 R44 R45 R46 R47 R48 R49 R50 R51 R52 R53 R54 R55 R56 R57 R58 R59 R60 R61 R62 R63 R64 R65 R66 R67 R68 R69 R70: "Resistor", LatestRevisionDate=17-Jul-2002, LatestRevisionNote="Re-released for DXP Platform.", PackageDescription="Axial Device, Thru-Hole; 2 Leads; 0.3 in Pin Spacing", PackageReference=AXIAL-0.3, Published=8-Jun-2000, Publisher="Altium Limited"
R41 R42: "Potentiometer", LatestRevisionDate=17-Jul-2002, LatestRevisionNote="Re-released for DXP Platform.", PackageDescription="Variable Resistor, Thru-Hole; 3 Leads", PackageReference=VR5, Published=8-Jun-2000, Publisher="Altium Limited", Set Position=0.5, Sim Note="Enter the Resistance value and the set point into parameter fields."
S1 S2 S3 S4 S5 S6 S7 S8 S9 S10 S11 S12 S13 S14 S15 S16 S17 S18 S19 S20 S21 S22 S23 S24 S25 S26 S27: "Switch Tactile N.O. SPST Round Button PC Pins 0.05A 12VDC 0.98N Thru-Hole Bulk", Package=None, Availability=Unavailable, MF=ALPS, MP=SKHHANA010, Price=None, SnapEDA_Link=https://www.snapeda.com/parts/SKHHANA010/ALPS/view-part/248805/?ref=snap
U1: Package="DIP-16 STMicroelectronics", Availability=Unavailable, DigiKey-Purchase-URL=https://snapeda.com/shop?store=DigiKey&id=45236, MF=STMicroelectronics, MP=ULN2004A, Price=None, SnapEDA_Link=https://www.snapeda.com/parts/ULN2004A/STMicroelectronics/view-part/45236/?ref=snap
U2: library part Component_1
U3: library part PIC(40)pin
U11: "Remote Receiver Sensor, 38.0kHz 45m Through Hole", Package=None, Availability=Unavailable, MF=Vishay, MP=TSOP4838, Price=None, SnapEDA_Link=https://www.snapeda.com/parts/TSOP4838/Vishay%20Semiconductor%20Opto%20Division/view-part/702087/?ref=snap
U12: "&plusmn;0.5&deg;C 4V-30V, Temperature sensor with analog output 3-TO-92", Package="TO-92-3 Texas Instruments", Availability=Warning, MF="Texas Instruments", MP=LM35CZ/LFT1, Price=None, SnapEDA_Link=https://www.snapeda.com/parts/LM35CZ/LFT1/Texas%20Instruments/view-part/18854/?ref=snap, Texas_Instruments-Purchase-URL=https://snapeda.com/shop?store=Texas+Instruments&id=18854
U13: library part MAX232N, "Dual EIA-232 Driver/Receiver", Package="PDIP-16 Texas Instruments", Availability=Unavailable, DigiKey-Purchase-URL=https://snapeda.com/shop?store=DigiKey&id=552531, MF="Texas Instruments", Mouser-Purchase-URL=https://snapeda.com/shop?store=Mouser&id=552531, MP=MAX232N, Price=None, SnapEDA_Link=https://www.snapeda.com/parts/MAX232N/Texas%20Instruments/view-part/552531/?ref=snap
U14: "EEPROM Memory IC 1Kb (128 x 8) SPI 2MHz 8-PDIP", Package="DIP-8 Microchip", Availability=Good, Check_prices=https://www.snapeda.com/parts/93LC46A/P/Microchip/view-part/184688/?ref=eda, MF=Microchip, MP=93LC46A/P, Price=None, Purchase-URL=https://pricing.snapeda.com/search/part/93LC46A/P/?ref=eda, SnapEDA_Link=https://www.snapeda.com/parts/93LC46A/P/Microchip/view-part/184688/?ref=snap
U15: library part 24AA1025-I/P, "EEPROM Memory IC 1Mb (128K x 8) I²C 400kHz 900ns 8-PDIP", Package="DIP-8 Microchip", Availability=Warning, Check_prices=https://www.snapeda.com/parts/24AA1025-I/P/Microchip/view-part/1178/?ref=eda, MF=Microchip, MP=24AA1025-I/P, Price=None, Purchase-URL=https://pricing.snapeda.com/search/part/24AA1025-I/P/?ref=eda, SnapEDA_Link=https://www.snapeda.com/parts/24AA1025-I/P/Microchip/view-part/1178/?ref=snap
U16: library part TLC5615CP, "10-bit, single-channel, low-power DAC with 12.5us settling time and power-on reset 8-PDIP 0 to 70", Package="PDIP-8 Texas", Availability=Warning, Check_prices=https://www.snapeda.com/parts/TLC5615CP/Texas%20Instruments/view-part/480984/?ref=eda, MF="Texas Instruments", MP=TLC5615CP, Price=None, Purchase-URL=https://pricing.snapeda.com/search/part/TLC5615CP/?ref=eda, SnapEDA_Link=https://www.snapeda.com/parts/TLC5615CP/Texas%20Instruments/view-part/480984/?ref=snap
U17: "Real Time Clock _RTC_ IC Clock/Calendar 31B 8-DIP _0.300, 7.62mm_", Package="PDIP-8 Maxim", Digi-Key_Part_Number=DS1302+-ND, Digi-Key_Purchase_URL=https://www.digikey.co.id/product-detail/en/maxim-integrated/DS1302-/DS1302--ND/956878?utm_source=snapeda&utm_medium=aggregator&utm_campaign=symbol, MF="Maxim Integrated", MP=DS1302+, SnapEDA_Link=https://www.snapeda.com/parts/DS1302%2B/Maxim%20Integrated/view-part/211653/?ref=snap
Y1 Y2: "Crystal Oscillator", LatestRevisionDate=17-Jul-2002, LatestRevisionNote="Re-released for DXP Platform.", PackageDescription="Crystal, Thru-Hole; 2 Leads; Body 3.1 x 8.2 mm (Dia.xH)", PackageReference=R38, Published=8-Jun-2000, Publisher="Altium Limited"

## Via types
v1: diameter 50, hole 28, Top Layer to Bottom Layer, 3 vias

## Nets (pads, with @x,y where several pads share a name; then routed paths per layer and width w, separated by ;. In a path a pad name is that pad's centre, name@x,y a point inside that pad or via, vN(x,y) a via of type N, cw(c..) or ccw(c..) an arc to the next point about the centre after c; other vN are vias at no path point)
1: 
1C: 
1D: 
2: 
2C: 
2D: 
3: 
3C: 
3D: 
4: 
4C: 
4D: 
5: 
5C: 
5D: 
6: 
6C: 
6D: 
7: 
8: 
9: 
10: 
11: 
12: 
13: 
14: 
15: 
16: 
+12: 
A: 
a1: 
a2: 
a3: 
a4: 
a5: 
a6: 
a7: 
a8: 
B: 
C: 
c1: 
c2: 
D: 
DP: 
E: 
en: 
F: 
G: 
GND: 
NetBUZ1_N: 
NetC1_1: 
NetC6_1: 
NetC9_1: 
NetC10_2: 
NetC12_1: 
NetC15_1: 
NetC17_1: 
NetC17_2: 
NetC18_1: 
NetC18_2: 
NetC28_1: 
NetC29_1: 
NetD1_1: 
NetD2_1: 
NetD3_1: 
NetD4_1: 
NetD5_1: 
NetD6_1: 
NetD7_2: 
NetD9_1: 
NetD10_1: 
NetD11_1: 
NetD12_2: 
NetD14_1: 
NetD15_1: 
NetD16_1: 
NetD17_1: 
NetD18_1: 
NetD20_1: 
NetD21_1: 
NetD22_1: 
NetD23_1: 
NetD24_1: 
NetD25_1: 
NetD26_1: 
NetD27_1: 
NetD28_1: 
NetD29_1: 
NetD30_1: 
NetP1_1: 
NetP1_2: 
NetP1_3: 
NetP1_4: 
NetP1_5: 
NetP1_6: 
NetP1_7: 
NetP1_8: 
NetP2_1: 
NetP2_2: 
NetP2_3: 
NetP2_4: 
NetP2_5: 
NetP2_6: 
NetP2_7: 
NetP2_8: 
NetP5_1: 
NetP5_2: 
NetP5_3: 
NetP5_4: 
NetP5_5: 
NetP5_6: 
NetP5_7: 
NetP5_8: 
NetP13_3: 
NetP16_2: 
NetP17_2: 
NetP19_1: 
NetP20_1: 
NetP21_1: 
NetP22_1: 
NetP23_4: 
NetP23_5: 
NetP24_1: 
NetP25_1: 
NetP26_1: 
NetP27_1: 
NetP28_1: 
NetP28_2: 
NetP28_3: 
NetP28_4: 
NetP29_2: 
NetP31_1: 
NetP31_3: 
NetP31_4: 
NetP31_5: 
NetP33_1: 
NetP33_2: 
NetP33_3: 
NetP33_4: 
NetP33_5: 
NetP33_6: 
NetP33_7: 
NetP33_8: 
NetP34_1: 
NetP34_2: 
NetP37_1: 
NetP37_2: 
NetP37_3: 
NetP38_1: 
NetP38_2: 
NetP38_3: 
NetP38_4: 
NetP38_5: 
NetP38_6: 
NetP38_7: 
NetP38_8: 
NetP39_1: 
NetP40_1: 
NetP40_2: 
NetP40_3: 
NetP40_4: 
NetP40_5: 
NetP40_6: 
NetP40_7: 
NetP40_8: 
NetP42_2: 
NetP44_1: 
NetP47_1: 
NetP47_2: 
NetP47_3: 
NetP47_4: 
NetP48_1: 
NetP48_2: 
NetP48_3: 
NetP48_4: 
NetQ1_2: 
NetR1_2: 
NetR28_2: 
NetR29_1: 
NetR30_2: 
NetR31_2: 
NetR32_2: 
NetR34_1: 
NetR36_1: 
NetR50_1: 
NetR51_1: 
NetR52_1: 
NetR53_1: 
NetR54_1: 
NetR63_1: 
NetR64_1: 
NetR65_1: 
NetS10_2: 
NetS11_2: 
OSC11: 
OSC21: 
RA0: 
RA1: 
RA2: 
RA3: 
RA4: 
RA5: 
RA6: 
RA7: 
RB0: 
RB1: 
RB2: 
RB3: 
RB4: 
RB5: 
RB6: 
RB7: 
RC0: 
RC1: 
RC2: 
RC3: 
RC4: 
RC5: 
RC6: 
RC7: 
RD0: 
RD1: 
RD2: 
RD3: 
RD4: 
RD5: 
RD6: 
RD7: 
RE0: 
RE1: 
RE2: 
reset: 
rs: 
rst: 
Rx: 
T0CKI: 
Tx: 
v: 
VCC: 
ve: 
vo: 
WP: 
pads on no net: BUZ1.N BUZ1.P C1.1 C1.2 C2.1 C2.2 C3.1 C3.2 C4.1 C4.2 C5.1 C5.2 C6.1 C6.2 C7.1 C7.2 C8.1 C8.2 C9.1 C9.2 C10.1 C10.2 C11.1 C11.2 C12.1 C12.2 C13.1 C13.2 C14.1 C14.2 C15.1 C15.2 C16.1 C16.2 C17.1 C17.2 C18.1 C18.2 C19.1 C19.2 C20.1 C20.2 C21.1 C21.2 C22.1 C22.2 C23.1 C23.2 C24.1 C24.2 C25.1 C25.2 C26.1 C26.2 C27.1 C27.2 C28.1 C28.2 C29.1 C29.2 C31.1 C31.2 D1.1 D1.2 D2.1 D2.2 D3.1 D3.2 D4.1 D4.2 D5.1 D5.2 D6.1 D6.2 D7.1 D7.2 D8.1 D8.2 D9.1 D9.2 D10.1 D10.2 D11.1 D11.2 D12.1 D12.2 D13.1 D13.2 D14.1 D14.2 D15.1 D15.2 D16.1 D16.2 D17.1 D17.2 D18.1 D18.2 D19.1 D19.2 D20.1 D20.2 D21.1 D21.2 D22.1 D22.2 D23.1 D23.2 D24.1 D24.2 D25.1 D25.2 D26.1 D26.2 D27.1 D27.2 D28.1 D28.2 D29.1 D29.2 D30.1 D30.2 D31.1 D31.2 D32.1 D32.2 D33.1 D33.2 D36.1 D36.2 D36.3 D36.4 D36.5 D36.6 D36.7 D36.8 D36.9 D36.10 D37.1 D37.2 D37.3 D37.4 D37.5 D37.6 D37.7 D37.8 D37.9 D37.10 D38.1 D38.2 D38.3 D38.4 D38.5 D38.6 D38.7 D38.8 D38.9 D38.10 J1.1 J1.2 J1.3 J2. J2.1 J2.2 J2.3 J2.4 J2.5 J2.6 J2.7 J2.8 J2.9 K1.1 K1.2 K1.3 K1.4 K1.5 K2.1 K2.2 K2.3 K2.4 K2.5 P1.1 P1.2 P1.3 P1.4 P1.5 P1.6 P1.7 P1.8 P2.1 P2.2 P2.3 P2.4 P2.5 P2.6 P2.7 P2.8 P3.1 P3.2 P4.1 P4.2 P4.3 P4.4 P4.5 P4.6 P4.7 P4.8 P4.9 P4.10 P4.11 P4.12 P4.13 P4.14 P4.15 P4.16 P4.17 P4.18 P5.1 P5.2 P5.3 P5.4 P5.5 P5.6 P5.7 P5.8 P12.1 P12.2 P12.3 P12.4 P12.5 P12.6 P12.7 P12.8 P13.1 P13.2 P13.3 P13.4 P13.5 P13.6 P13.7 P13.8 P13.9 P13.10 P13.11 P13.12 P13.13 P13.14 P13.15 P13.16 P14.1 P14.2 P14.3 P14.4 P14.5 P14.6 P14.7 P14.8 P14.9 P14.10 P14.11 P14.12 P14.13 P14.14 P14.15 P14.16 P14.17 P14.18 P14.19 P14.20 P15.1 P15.2 P15.3 P15.4 P15.5 P15.6 P15.7 P15.8 P15.9 P15.10 P15.11 P15.12 P15.13 P16.1 P16.2 P17.1 P17.2 P17.3 P17.4 P18.1 P18.2 P18.3 P18.4 P19.1 P20.1 P20.2 P21.1 P21.2 P22.1 P22.2 P23.1 P23.2 P23.3 P23.4 P23.5 P23.6 P23.7 P23.8 P23.9 P23.10 P24.1 P24.2 P25.1 P25.2 P26.1 P26.2 P27.1 P27.2 P28.1 P28.2 P28.3 P28.4 P29.1 P29.2 P30.1 P30.2 P30.3 P30.4 P31.1 P31.2 P31.3 P31.4 P31.5 P31.6 P32.1 P32.2 P32.3 P32.4 P32.5 P32.6 P33.1 P33.2 P33.3 P33.4 P33.5 P33.6 P33.7 P33.8 P34.1 P34.2 P35.1 P35.2 P35.3 P35.4 P35.5 P35.6 P35.7 P35.8 P36.1 P36.2 P37.1 P37.2 P37.3 P38.1 P38.2 P38.3 P38.4 P38.5 P38.6 P38.7 P38.8 P39.1 P39.2 P40.1 P40.2 P41.1 P41.2 P41.3 P42.1 P42.2 P43.1 P43.2 P43.3 P43.4 P43.5 P43.6 P43.7 P43.8 P44.1 P44.2 P44.3 P45.1 P45.2 P45.3 P46.1 P46.2 P47.1 P47.2 P47.3 P47.4 P48.1 P48.2 P48.3 P48.4 P49.1 P49.2 P49.3 P49.4 P50.1 P50.2 P50.3 P50.4 P50.5 P50.6 P50.7 P50.8 P50.9 P50.10 P50.11 P50.12 P50.13 P50.14 P50.15 P50.16 P50.17 P50.18 Q1.1 Q1.2 Q1.3 Q2.1 Q2.2 Q2.3 Q3.1 Q3.2 Q3.3 Q4.1 Q4.2 Q4.3 Q5.1 Q5.2 Q5.3 Q6.1 Q6.2 Q6.3 Q7.1 Q7.2 Q7.3 R1.1 R1.2 R1.3 R2.1 R2.2 R3.1 R3.2 R4.1 R4.2 R5.1 R5.2 R6.1 R6.2 R7.1 R7.2 R8.1 R8.2 R9.1 R9.2 R10.1 R10.2 R11.1 R11.2 R12.1 R12.2 R13.1 R13.2 R14.1 R14.2 R15.1 R15.2 R16.1 R16.2 R17.1 R17.2 R18.1 R18.2 R19.1 R19.2 R20.1 R20.2 R21.1 R21.2 R22.1 R22.2 R23.1 R23.2 R24.1 R24.2 R25.1 R25.2 R26.1 R26.2 R27.1 R27.2 R28.1 R28.2 R29.1 R29.2 R30.1 R30.2 R31.1 R31.2 R32.1 R32.2 R32.3 R33.1 R33.2 R34.1 R34.2 R35.1 R35.2 R36.1 R36.2 R37.1 R37.2 R38.1 R38.2 R39.1 R39.2 R40.1 R40.2 R41.1 R41.2 R41.3 R42.1 R42.2 R42.3 R43.1 R43.2 R43.3 R43.4 R43.5 R43.6 R43.7 R43.8 R43.9 R44.1 R44.2 R45.1 R45.2 R46.1 R46.2 R47.1 R47.2 R48.1 R48.2 R49.1 R49.2 R50.1 R50.2 R51.1 R51.2 R52.1 R52.2 R53.1 R53.2 R54.1 R54.2 R55.1 R55.2 R56.1 R56.2 R57.1 R57.2 R58.1 R58.2 R59.1 R59.2 R60.1 R60.2 R61.1 R61.2 R62.1 R62.2 R63.1 R63.2 R64.1 R64.2 R65.1 R65.2 R66.1 R66.2 R67.1 R67.2 R68.1 R68.2 R69.1 R69.2 R70.1 R70.2 S1.1 S1.2 S1.3 S1.4 S2.1 S2.2 S2.3 S2.4 S3.1 S3.2 S3.3 S3.4 S4.1 S4.2 S4.3 S4.4 S5.1 S5.2 S5.3 S5.4 S6.1 S6.2 S6.3 S6.4 S7.1 S7.2 S7.3 S7.4 S8.1 S8.2 S8.3 S8.4 S9.1 S9.2 S9.3 S9.4 S10.1 S10.2 S10.3 S10.4 S11.1 S11.2 S11.3 S11.4 S12.1 S12.2 S12.3 S12.4 S13.1 S13.2 S13.3 S13.4 S14.1 S14.2 S14.3 S14.4 S15.1 S15.2 S15.3 S15.4 S16.1 S16.2 S16.3 S16.4 S17.1 S17.2 S17.3 S17.4 S18.1 S18.2 S18.3 S18.4 S19.1 S19.2 S19.3 S19.4 S20.1 S20.2 S20.3 S20.4 S21.1 S21.2 S21.3 S21.4 S22.1 S22.2 S22.3 S22.4 S23.1 S23.2 S23.3 S23.4 S24.1 S24.2 S24.3 S24.4 S25.1 S25.2 S25.3 S25.4 S26.1 S26.2 S26.3 S26.4 S27.1 S27.2 S27.3 S27.4 SS1.1 SS1.2 SS1.3 SS2.1 SS2.2 SS2.3 SS3.1 SS3.2 SS3.3 SS4.1 SS4.2 SS4.3 SS5.1 SS5.2 SS5.3 U1.1 U1.2 U1.3 U1.4 U1.5 U1.6 U1.7 U1.8 U1.9 U1.10 U1.11 U1.12 U1.13 U1.14 U1.15 U1.16 U2.1 U2.2 U2.3 U3.1 U3.2 U3.3 U3.4 U3.5 U3.6 U3.7 U3.8 U3.9 U3.10 U3.11 U3.12 U3.13 U3.14 U3.15 U3.16 U3.17 U3.18 U3.19 U3.20 U3.21 U3.22 U3.23 U3.24 U3.25 U3.26 U3.27 U3.28 U3.29 U3.30 U3.31 U3.32 U3.33 U3.34 U3.35 U3.36 U3.37 U3.38 U3.39 U3.40 U11.GND U11.OUT U11.VCC U12.1 U12.2 U12.3 U13.1 U13.2 U13.3 U13.4 U13.5 U13.6 U13.7 U13.8 U13.9 U13.10 U13.11 U13.12 U13.13 U13.14 U13.15 U13.16 U14.1 U14.2 U14.3 U14.4 U14.5 U14.6 U14.7 U14.8 U15.1 U15.2 U15.3 U15.4 U15.5 U15.6 U15.7 U15.8 U16.1 U16.2 U16.3 U16.4 U16.5 U16.6 U16.7 U16.8 U17.1 U17.2 U17.3 U17.4 U17.5 U17.6 U17.7 U17.8 U18.1 U18.2 U18.3 U18.4 U18.5 U18.6 U18.7 U18.8 U18.9 U18.10 U18.11 U18.12 U18.13 U18.14 U18.15 U18.16 Y1.1 Y1.2 Y2.1 Y2.2
copper on no net: | length 379742.7
  Top Layer w39.37: v1(1032.66,7437.17) 1036.16,7440.66 v1(1036.16,7665.35) ; 7144.31,3675.79 7144.31,2819.49 v1(7183.68,2780.12)
  Bottom Layer w15.75: 662.14,5244.09 662.14,5204.72 711.35,5155.51 711.35,5057.09 721.2,5047.24
  Bottom Layer w19.68: 660.57,5265.35 660.57,5274.8 ; 711.35,5057.09 740.88,5027.56 1242.85,5027.56 1279.07,5063.78 1279.07,5266.93 ; 731.04,4713.78 721.2,4723.62 721.2,4930.31 759.39,4968.5 760.57,4968.5 770.41,4978.35 1221.98,4978.35 ; 837.6,4507.09 996.79,4507.09 1026.31,4536.61 1026.31,4909.45 1046,4929.13 1301.91,4929.13 1311.75,4919.29 1311.75,4870.08 1321.98,4859.84 1420.41,4859.84 ; 839.31,3877.17 849.15,3887.01 977.1,3887.01 1105.06,4014.96 1105.06,4732.28 1124.74,4751.97 1272.38,4751.97 ; 849.15,4182.28 858.99,4192.13 1047.18,4192.13 1065.68,4210.63 1065.68,4781.5 1085.37,4801.18 1351.12,4801.18 ; 918.05,8679.13 918.05,8807.09 927.89,8816.93 1075.53,8816.93 1095.21,8797.24 ; 1379.07,5262.2 1379.07,5059.84 1411.35,5027.56 1775.53,5027.56 1784.19,5018.9 1784.19,4998.03 ; 1479.07,5253.94 1479.07,5086.61 1498.76,5066.93 1813.72,5066.93 1835.76,5044.88 1835.76,4882.91 1812.69,4859.84 ; 1577.5,5253.94 1577.5,5116.14 1587.34,5106.3 1853.09,5106.3 1875.13,5084.25 1875.13,4794.17 1840.8,4759.84 ; 1675.92,5253.94 1675.92,5165.35 1695.61,5145.67 1892.46,5145.67 1914.5,5123.62 1914.5,4675.59 1898.76,4659.84 1849.54,4659.84 ; 1726.71,4859.84 1558.2,4859.84 1557.81,4860.24 1536.55,4838.98 1536.55,4038.42 1580.87,3994.09 1587.34,3994.09 2532.22,3994.09 2551.91,4013.78 2551.91,4840.55 2532.81,4859.64 2335.37,4860.24 ; 1728.28,4759.84 1595.21,4759.84 1579.86,4744.49 1579.86,4050.79 1597.18,4033.46 2496.23,4033.46 2512.54,4049.77 2512.54,4742.13 2494.82,4759.84 2333.4,4759.84 ; 1728.68,4559.84 1680.65,4559.84 1658.6,4537.8 1658.6,4129.53 1675.92,4112.2 2414.11,4112.2 2433.8,4131.89 2433.8,4545.28 2419.23,4559.84 2335.37,4559.84 ; 1729.86,4659.84 1642.85,4659.84 1619.23,4636.22 1619.23,4090.16 1636.55,4072.83 2453.48,4072.83 2473.17,4092.52 2473.17,4633.86 2447.18,4659.84 2335.37,4659.84 ; 1744.82,3324.8 1774.35,3354.33 1774.35,3442.91 ; 1745.55,4459.84 1742.4,4456.69 1725.13,4456.69 1697.97,4429.53 1697.97,4168.9 1715.29,4151.57 2374.74,4151.57 2394.43,4171.26 2394.43,4437.01 2374.74,4456.69 2335.37,4456.69 ; 1754.66,3167.32 1951.51,3167.32 1971.2,3187.01 1971.2,3472.44 ; 1754.66,3246.06 1853.09,3246.06 1872.77,3265.75 1872.77,3462.6 ; 1756.24,4359.84 1737.34,4340.94 1737.34,4190.94 2335.37,4190.94 2355.06,4210.63 2355.06,4339.76 2335.37,4359.45 ; 1784.19,5263.78 1784.19,5204.72 1803.87,5185.04 1931.83,5185.04 1953.87,5162.99 1953.87,4577.17 1936.55,4559.84 1857.81,4559.84 ; 1882.61,5263.78 1882.61,5273.62 ; 1902.3,5244.09 1931.83,5244.09 1993.24,5182.68 1993.24,4478.74 1971.2,4456.69 1914.5,4456.69 1913.32,4457.87 ; 1951.51,4359.45 2011.75,4359.45 2032.61,4380.31 2032.61,5231.19 2030.25,5233.55 2030.25,5234.25 1999.54,5264.96 ; 2040.09,4270.87 2049.94,4261.02 2049.94,4277.17 2071.98,4299.21 ; 2079.46,4261.02 2071.98,4268.5 2071.98,4299.21 ; 2079.46,5253.94 2071.98,5246.46 2071.98,4299.21 ; 2108.99,4261.02 2108.99,4262.2 2071.98,4299.21 ; 3457.42,8511.81 4017.24,8511.81 4043.98,8538.54 4379.82,8538.54 4421.98,8580.71 4421.98,8629.92 ; 3467.26,8580.71 4303.87,8580.71 4323.56,8600.39 4323.56,8629.92 ; 3467.26,8679.13 3536.16,8679.13 3585.37,8629.92 4195.61,8629.92 4225.13,8659.45 ; 4025.28,8404.17 4025.28,8464.17 4060.28,8499.17 4805.28,8499.17 ; 4125.28,8359.17 4125.28,8434.17 4150.28,8459.17 4735.28,8459.17 4755.28,8439.17 4755.28,8404.17 ; 4225.28,8359.17 4225.28,8404.17 4235.28,8414.17 4680.28,8414.17 4695.28,8399.17 4695.28,8384.17 ; 4645.28,8574.17 4645.28,8554.17 4658.39,8541.06 5212.17,8541.06 5235.28,8564.17 5235.28,8584.17 ; 4705.28,8619.17 4705.28,8599.17 4724.02,8580.43 5111.54,8580.43 5135.28,8604.17 5135.28,8634.17 ; 4760.91,8689.17 4760.91,8663.37 4804.48,8619.8 5020.91,8619.8 5035.28,8634.17 ; 4935.28,8364.17 4935.28,8434.17 4960.91,8459.8 5554.65,8459.8 5575.28,8439.17 5575.28,8394.17 ; 4995.17,3458.23 5172.34,3458.23 5192.02,3438.54 5192.02,2956.26 ; 5005.02,3113.74 5034.54,3113.74 5044.39,3103.9 5044.39,2621.61 5054.23,2611.77 5093.6,2611.77 ; 5014.86,3202.32 5123.13,3202.32 5132.97,3192.48 5132.97,2975.94 ; 5035.28,8344.17 5035.28,8399.17 5056.54,8420.43 5499.02,8420.43 5516.86,8402.6 5516.86,8354.17 ; 5460.28,8589.17 5460.28,8554.17 5475.28,8539.17 6025.28,8539.17 6050.28,8564.17 6050.28,8599.17 ; 5520.28,8624.17 5520.28,8594.17 5534.02,8580.43 5936.54,8580.43 5950.28,8594.17 5950.28,8604.17 ; 5570.28,8389.17 5575.28,8394.17 ; 5580.28,8399.17 5575.28,8394.17 ; 5580.28,8664.17 5580.28,8644.17 5604.65,8619.8 5830.91,8619.8 5850.28,8639.17 5850.28,8659.17 ; 5650.28,8419.17 5650.28,8474.17 5625.28,8499.17 4870.28,8499.17 ; 7366.51,2666.18 7390.37,2642.32 7390.37,2317.52 ; 7370.69,2976.97 7419.9,2976.97 7439.58,2957.28 7439.58,2513.26 7462.42,2490.43 7462.42,2106.57 7436.12,2080.28 ; 7439.02,3577.36 7497.1,3577.36 7526.63,3547.83 7526.63,2590.16 7539.27,2577.52 7578.64,2577.52 ; 7478.95,3272.24 7487.26,3263.94 7487.26,2521.26 7531,2477.52 ; 7498.64,3636.42 7547.85,3636.42 7567.54,3616.73 7567.54,3095.08 7587.22,3075.39 ; 7671.08,2285.71 7673.13,2283.66 7673.13,2117.99 ; 8195.88,2515.94 8195.88,2552.17 8217.14,2573.43 8354.94,2573.43 8374.62,2553.74 8374.62,2356.89 8395.33,2336.18 8826.35,2336.18 8847.06,2356.89 8847.06,3141.06 8815.48,3172.65 8795.5,3172.65 ; 8511.39,4572.48 8511.39,4316.57 8541.94,4286.02 9162.02,4286.02 9191.55,4315.55 9191.55,4384.45 ; 8601,4722.24 8601,4354.92 8630.53,4325.39 9083.28,4325.39 9112.81,4354.92 9112.81,4532.09 9132.5,4551.77 ; 8817.54,4453.35 8758.48,4453.35 8734.22,4477.6 8734.22,5039.33 8758.48,5063.58 9043.91,5063.58 ; 8847.06,4660.04 8831.39,4660.04 8817.54,4673.9 8817.54,4837.2 8852.18,4871.85 9353.76,4871.85 9458.87,4766.73 9495.79,4766.73 ; 8848.64,4560.04 8799.43,4560.04 8778.17,4581.3 8778.17,4866.73 8822.65,4911.22 9406.98,4911.22 9451.47,4866.73 9476.2,4866.73 ; 8891.55,4802.95 8921.08,4832.48 9304.54,4832.48 9470.29,4666.73 ; 8982.65,2674.22 8963.28,2654.85 8963.28,2122.56 9004.54,2081.3 ; 9018.87,2572.65 9004.54,2558.31 9004.54,2180.46 9024.96,2160.04 ; 9617.1,4667.13 9625.21,4659.02 ; 4805.28,8499.17 4870.28,8499.17 ; 4805.28,8499.17 4835.28,8469.17 4840.28,8469.17 4870.28,8499.17